# Altium PCB CPS.PcbDoc
Units mm, origin at the board's own origin, x right, y up, seen from the top; angles counter-clockwise.
Board outline 200 x 10 mm, 2 copper layers (Top Layer, Bottom Layer); 13 components, 6 nets, 26 pads, 1 vias.
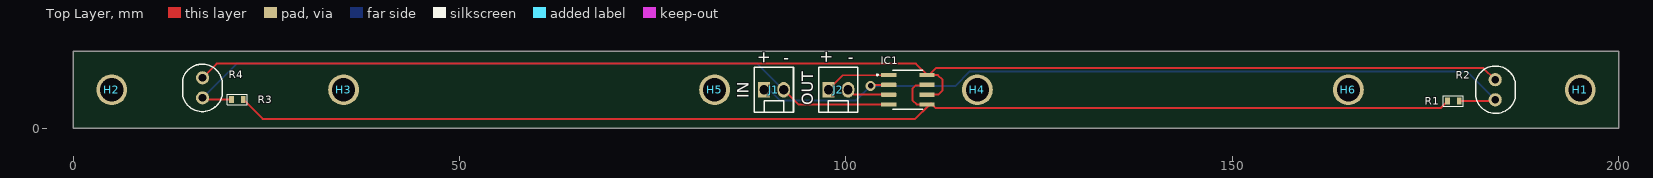
[diagram p0: Top Layer view]
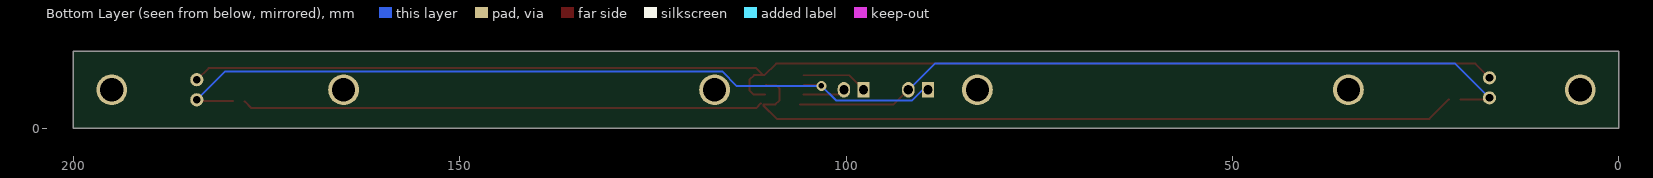
[diagram p1: Bottom Layer view, seen from below]
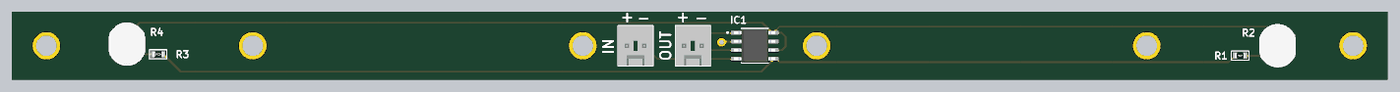
[diagram p2: 3D render of the assembled board from above, using the file's embedded part models]

## Layer stack, top to bottom
Top Solder: solder mask 0.0102, Solder Resist, Dk 3.5
Top Layer: signal copper 0.0356
Dielectric 1: dielectric 0.32, FR-4, Dk 4.8
Bottom Layer: signal copper 0.0356
Bottom Solder: solder mask 0.0102, Solder Resist, Dk 3.5

## Board outline
0,0 0,10 200,10 200,0
board region "Default Layer Stack Region": 160,10 200,10 200,0 160,0
board region "Default Layer Stack Region": 40,0 0,0 0,10 40,10
board region "Default Layer Stack Region": 80,0 40,0 40,10 80,10
board region "Default Layer Stack Region": 120,10 160,10 160,0 120,0
board region "Default Layer Stack Region": 120,0 80,0 80,10 120,10

## Design rules (kind name [scope] priority, off if disabled: settings)
Clearance [All] p1: gap=0.254 ignorepadtopadclearanceinfootprint=FALSE except(0: Arc-Hole Track-Hole SMDPad-Hole THPad-Hole Via-Hole Fill-Hole Poly-Hole Region-Hole Text-Hole)
PolygonConnect [All] p1: connectstyle=Relief reliefconductorwidth=0.254 reliefentries=4 polygonreliefangle="90 Angle" airgapwidth=0.254
RoutingVias [All] p1: holewidth=0.711 width=1.27 viastyle="Through Hole" minholewidth=0.711 minwidth=1.27 maxholewidth=0.711 maxwidth=1.27
SolderMaskExpansion [All] p1: expansion=0.102 istentingtop=FALSE
Width [All] p1: maxlimit=0.254 minlimit=0.254 preferedwidth=0.254 substack1={D048174E-86B5-43EA-A5F9-D9497140BC20}
30 further rules are at their usual default settings.

## Components (designator, comment, footprint, x,y, rotation, side; value= is the part's Value field where it differs from the comment)
H1 "Hole" Hole 195,5 r0 top
H2 "Hole" Hole 5,5 r0 top
H3 "Hole" Hole 35,5 r0 top
H4 "Hole" Hole 117,5 r0 top
H5 "Hole" Hole 83,5 r0 top
H6 "Hole" Hole 165,5 r0 top
IC1 "TDA2822D" TDA2822D 108,5 r0 top
J1 "1x2 Header" CONECTOR 90.665,5 r90 top
J2 "1x2 Header" CONECTOR 99,5 r90 top
R1 "10k" R0603 178.575,3.55 r0 top
R2 "500k" PHOTORESISTOR 184,5 r90 top
R3 "10k" R0603 21.25,3.75 r180 top
R4 "500k" PHOTORESISTOR 16.75,5.25 r270 top

## Footprints (in the part's own frame and the unit in brackets; to place one, negate y for a bottom-side part, rotate by r counter-clockwise, add the part's x,y. Pads: shape width x height; smd on the part's side, far side on the other; paste and mask are expansions set on the pad)
CONECTOR [mm]
  rect 2x1.6 hole 1.2: 1(0,1.27)
  oval 2x1.6 hole 1.2: 2(0,-1.27)
  silkscreen extent -2.92,-2.54 2.92,2.54, body extent -2.9,-2.54 2.9,2.54, height 11.71
Hole [mm]
  round 4 hole 3: ""(0,0)
PHOTORESISTOR [mm]
  round 1.7 hole 1: 1(-1.3,0) 2(1.3,0)
  silkscreen extent -3.05,-2.59 3.07,2.53, body extent -3.02,-2.57 2.98,2.53, height 2
R0603 [mm] "Guidelines for Footprint Design - Walsin Technology Corporation"
  rect 0.6x0.9 smd: 1(-0.75,0) 2(0.75,0)
  silkscreen extent -1.28,-0.67 1.28,0.67, body extent -0.8,-0.4 0.8,0.4, height 0.44
TDA2822D [mm]
  rrect25% 1.97x0.57 smd: 1(-2.475,1.905) 2(-2.475,0.635) 3(-2.475,-0.635) 4(-2.475,-1.905) 5(2.475,-1.905) 6(2.475,-0.635) 7(2.475,0.635) 8(2.475,1.905)
  silkscreen extent -4.05,-2.51 1.95,2.51, body extent -3,-2.45 3,2.45, height 1.75

## Part data
IC1: "Audio Amp Headphone/Speaker 1-CH Mono/2-CH Stereo 1W Class-AB 8-Pin SO N Tube", Manufacturer=STMicroelectronics, Supplier Part Number 1=511-TDA2822D, Category="Amplifiers - Audio", ComponentLink1Description=https://datasheet.ciiva.com/15131/getdatasheetpartid-132869-15131661.pdf?src-supplier=Verical, ComponentLink1URL=https://datasheet.ciiva.com/15131/getdatasheetpartid-132869-15131661.pdf?src-supplier=Verical, ComponentLink2Description=https://datasheet.ciiva.com/1481/1449855-1481709.pdf?src-supplier=Element14, ComponentLink2URL=https://datasheet.ciiva.com/1481/1449855-1481709.pdf?src-supplier=Element14, ComponentLink3Description=https://datasheet.ciiva.com/1789/cd00000133-1789121.pdf?src-supplier=Digikey, ComponentLink3URL=https://datasheet.ciiva.com/1789/cd00000133-1789121.pdf?src-supplier=Digikey, Manufacturer Part Number=TDA2822D, Pricing 1="1=2.18, 10=1.96, 50=1.85, 100=1.56, 1000=1.08, 10000=0.961 (USD)", RoHS=Yes, Stock 1=17648, Supplier 1=Mouser
J1 J2: library part 22-29-2021, "KK 254 Wire-to-Board Header, Vertical, with Friction Lock, 2 Circuits, Gold (Au) Plating", Manufacturer=Molex, Voltage Rating (DC)=250V, Category="Headers and Wire Housings", Manufacturer Part Number=22-29-2021, Plating=154ConductorMaterial, Pricing 1="1=0.45, 10=0.357, 50=0.357, 100=0.297, 1000=0.257, 10000=0.206 (USD)", Reach SVHC Compliant=4187SVHC, RoHS=Yes, Stock 1=18304, Supplier 1=Mouser
R1 R3: library part CRCW060310K0FKEA, "SMD Chip Resistor, 10 kOhm, ± 1%, 100 mW, 0603 [1608 Metric], Thick Film, General Purpose", Case Code (Imperial)=0603, Case Code (Metric)=1608, Manufacturer=Vishay, Max Operating Temperature=155°C, Max Power Dissipation=100mW, Min Operating Temperature=-55°C, Package Quantity=10, Resistance=10kR, Resistance Tolerance=1%, Resistor Type="Thick Film", Supplier Part Number 1=71-CRCW0603-10K-E3, Temperature Coefficient=100ppm/°C, Voltage Rating=75V, Case/Package=0603, Category="Chip SMD Resistors", Construction=Rectangular, Contact Plating=Tin, Depth=0.85mm, Features="Automotive AEC-Q200", Height=0.45mm, Lead Free=5697LeadFree, Length=1.55mm, Manufacturer Part Number=CRCW060310K0FKEA, Military Standard=Not, Number of Pins=2NUMBER, Number of Terminations=2, Packaging="Tape and Reel", Power Rating=100mW, Pricing 1="1=0.1, 10=0.017, 50=0.017, 100=0.01, 1000=0.008, 10000=0.004 (USD)", Radiation Hardening=No, Reach SVHC Compliant=Unknown, RoHS=Yes, RoHS Compliant=Yes, Series=CRCW, Size Code=0603, Stock 1=2811302, Supplier 1=Mouser, Technology="THICK FILM", Termination=SMD/SMT, Tolerance=1%, Voltage Rating (DC)=75V, Weight=7.1E-05oz, Width=0.033inch
R2 R4: library part VT90N2, "Ldr, 500 Kohm, 80MW, VT900 Series", Manufacturer=Excelitas, Supplier Part Number 1=70219703, ComponentLink1Description=https://datasheet.ciiva.com/1249/612931-1249375.pdf?src-supplier=Element14, ComponentLink1URL=https://datasheet.ciiva.com/1249/612931-1249375.pdf?src-supplier=Element14, Manufacturer Part Number=VT90N2, RoHS=No, Supplier 1="Allied Electronics"

## Via types
v1: diameter 1.27, hole 0.711, Top Layer to Bottom Layer, 1 vias

## Nets (pads, with @x,y where several pads share a name; then routed paths per layer and width w, separated by ;. In a path a pad name is that pad's centre, name@x,y a point inside that pad or via, vN(x,y) a via of type N, cw(c..) or ccw(c..) an arc to the next point about the centre after c; other vN are vias at no path point)
NetIC1_1: IC1.1 J2.1 | length 8.6
  Top Layer w0.254: J2.1 99.605,6.875 IC1.1@105.525,6.875
NetIC1_2: IC1.2 J1.1 R1.2 R2.1 | length 105.2
  Top Layer w0.254: v1(103.175,5.5) 103.3,5.625 IC1.2@105.45,5.625 ; R1.2 183.9,3.55 R2.1@184,3.65
  Bottom Layer w0.254: J1.1@89.575,5.3 89.765,5.3 91.446,3.619 101.294,3.619 v1(103.175,5.5) ; v1@103.2,5.475 114.108,5.475 116.014,7.381 180.319,7.381 R2.1
NetIC1_3: IC1.3 J2.2 | length 5.4
  Top Layer w0.254: J2.2@100.35,4.925 100.91,4.365 IC1.3
NetIC1_4: IC1.4 J1.2 R3.2 R4.2 | length 97
  Top Layer w0.254: R4.2 16.95,3.75 R3.2 ; J1.2 93.86,3.075 IC1.4@105.95,3.075
  Bottom Layer w0.254: R4.2 21.175,8.375 88.5,8.375 J1.2@91.9,4.975
NetIC1_5: IC1.5 IC1.7 R1.1 R3.1 | length 163.8
  Top Layer w0.254: R3.1 24.525,1.225 108.95,1.225 110.675,2.95 110.675,3.095 IC1.5 109.13,3.095 108.625,3.6 108.625,5.125 108.6,5.15 109.025,5.575 110.3,5.575 IC1.7@110.35,5.625 ; IC1.5@110.996,3.229 111.041,3.229 111.333,2.937 111.333,2.892 111.606,2.619 176.919,2.619 R1.1@177.8,3.5
NetIC1_6: IC1.6 IC1.8 R2.2 R4.1 | length 175.3
  Top Layer w0.254: R4.1 18.575,8.375 109.05,8.375 IC1.8@110.55,6.875 ; IC1.6 111.94,4.365 112.5,4.925 112.5,6.3 111.9,6.9 IC1.8@110.575,6.9 ; IC1.8@110.55,6.905 110.73,6.905 111.625,7.8 182.475,7.8 R2.2@183.925,6.35
pads on no net: H1. H2. H3. H4. H5. H6.

## Polygon pours and split planes (outlines as drawn)
no net on Layer0 "Default Coverlay 2 Top" (split plane): 120,10 160,10 160,0 120,0
no net on Layer0 "Default Coverlay 2 Top" (split plane): 80,0 40,0 40,10 80,10
no net on Layer0 "Default Coverlay 2 Bottom" (split plane): 120,10 160,10 160,0 120,0
no net on Layer0 "Default Coverlay 2 Bottom" (split plane): 80,0 40,0 40,10 80,10

## Silkscreen, mask and mechanical layers (free items; w line width, h text height)
Flex Top Overlay:
  text "-" at 101.023,9.609 h1.52 r180
  text "-" at 92.657,9.544 h1.52 r180
  text "IN" at 87.444,3.888 h1.52 r90
  text "OUT" at 95.762,2.969 h1.52 r90

## Text inside footprints (layer, text, board x,y; h text height)
J1: Flex Top Overlay "+" at 90.048,8.31 h1.52 r90
J2: Flex Top Overlay "+" at 98.15,8.341 h1.52 r90